# Altium PCB Drug Delivery CON_V113.PcbDoc (part 1 of 2)
Units mm, origin at the board's own origin, x right, y up, seen from the top; angles counter-clockwise.
Board outline 130.05 x 70.61 mm, 2 copper layers (Top Layer, Bottom Layer); 189 components, 131 nets, 618 pads, 110 vias.
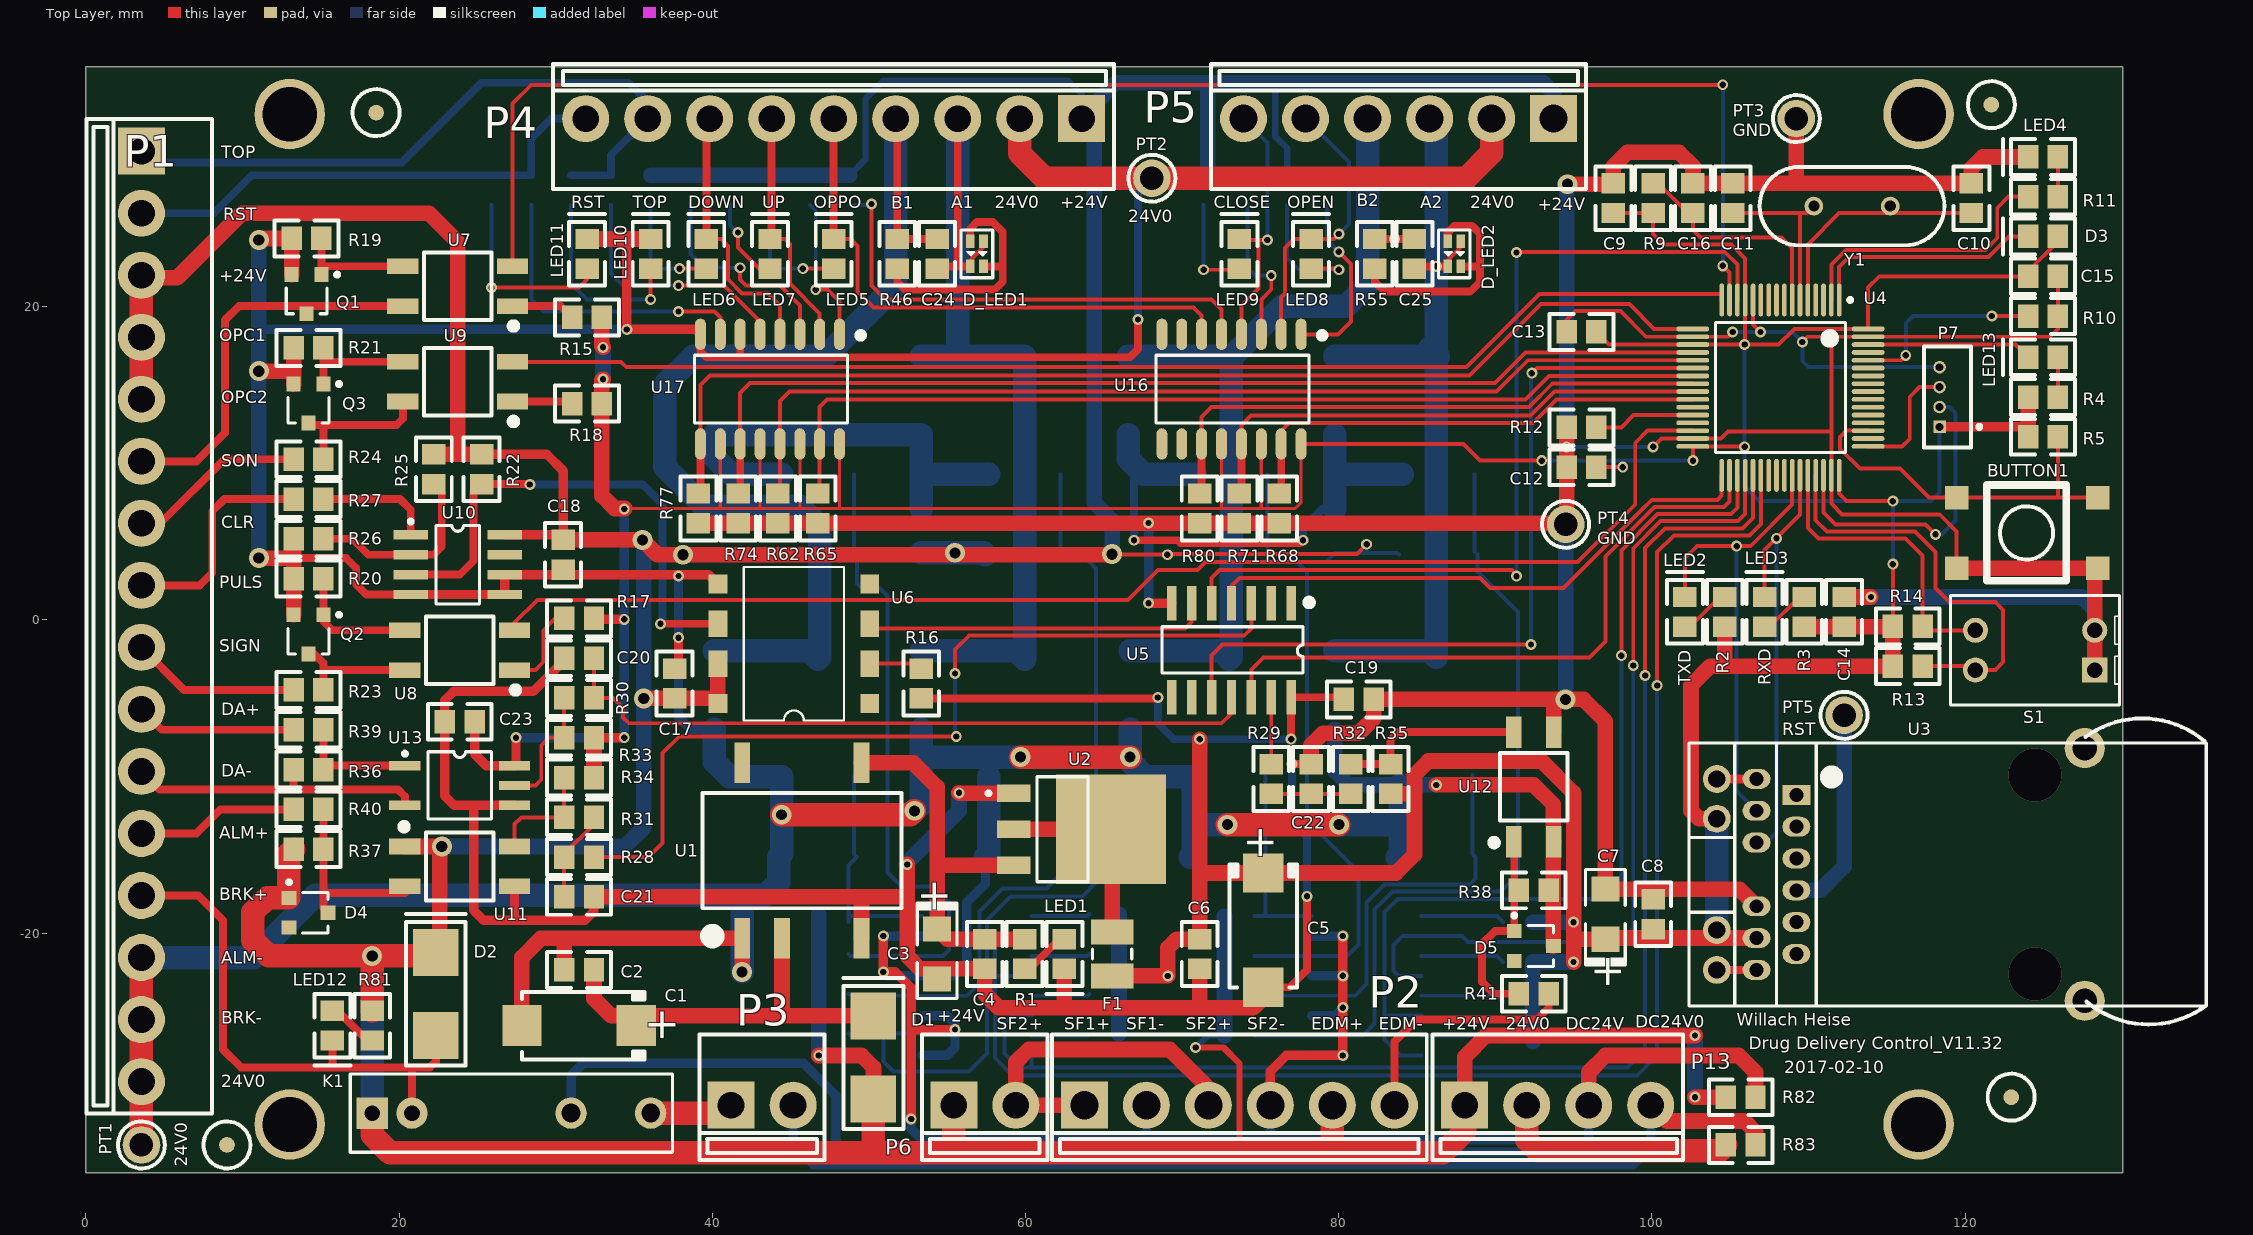
[diagram p0: Top Layer view]
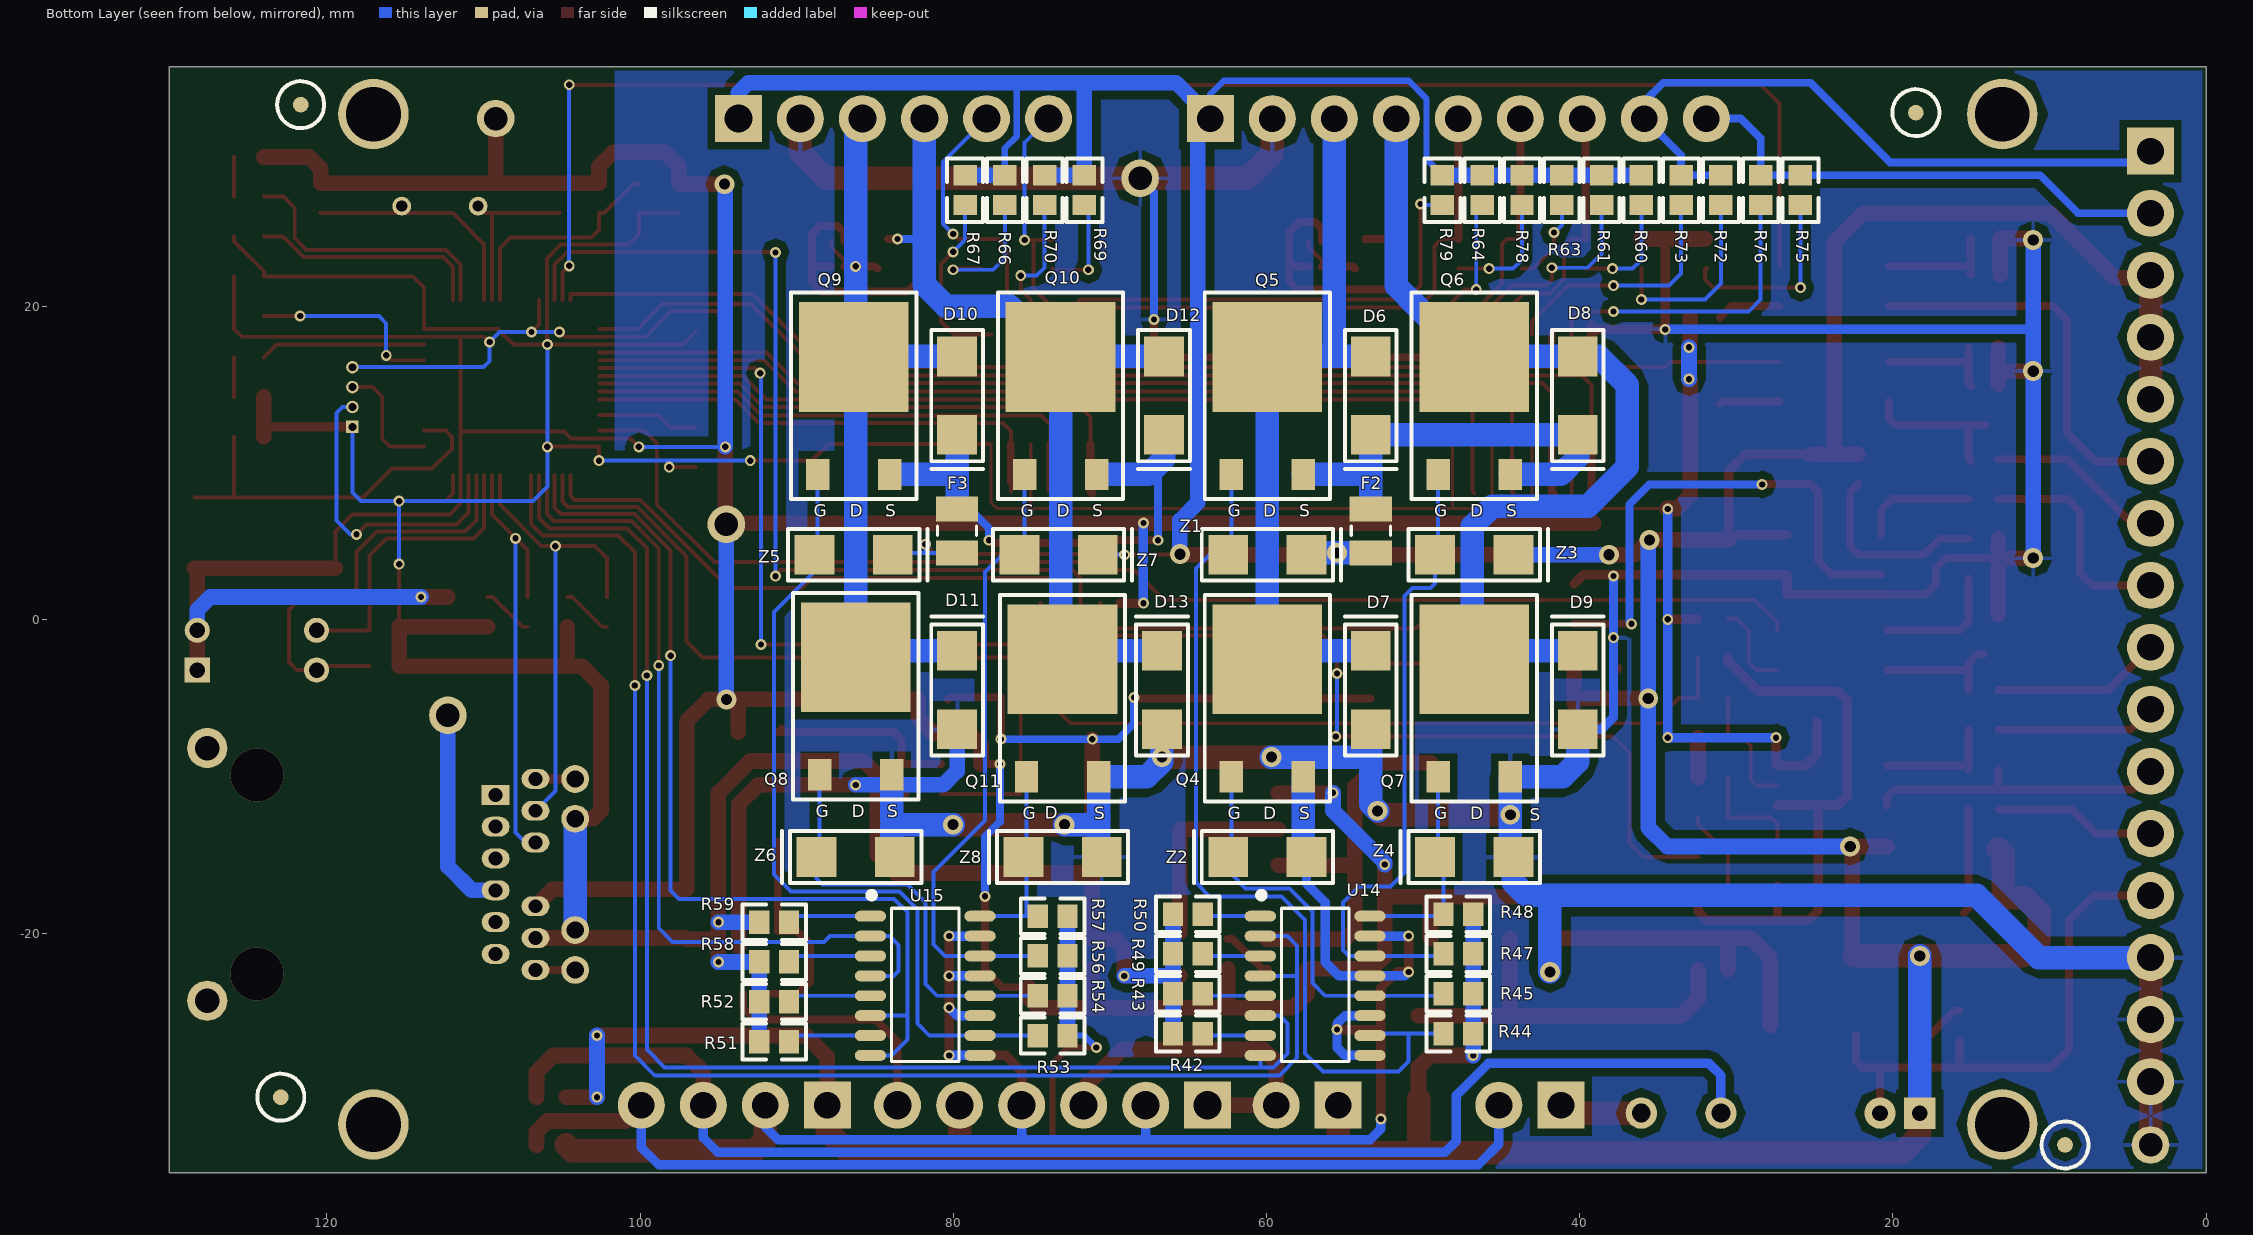
[diagram p1: Bottom Layer view, seen from below]

## Layer stack, top to bottom
Top Layer: signal copper 0.0356
Dielectric: dielectric 0.32, FR-4, Dk 4.8
Bottom Layer: signal copper 0.0356

## Board outline
0,35.306 0,-35.306 130.048,-35.306 130.048,35.306

## Design rules (kind name [scope] priority, off if disabled: settings)
Clearance [All] p1: gap=0.2
ComponentClearance [All] p1: gap=0.254 collisioncheckmode=3 verticalgap=0.254
PolygonConnect [All] p1: connectstyle=Relief reliefconductorwidth=0.254 reliefentries=4 polygonreliefangle="90 Angle"
RoutingVias [All] p1: holewidth=0.4 width=0.7 viastyle="Through Hole" minholewidth=0.4 minwidth=0.7 maxholewidth=0.711 maxwidth=1.27
SolderMaskExpansion [All] p1: expansion=0.102
TestPointUsage [All] p1: valid=0 allowmultiple=FALSE
Testpoint [All] p1: side=15 testpointundercomponent=TRUE minsize=1.016 maxsize=2.54 preferedsize=1.524 minholesize=0 maxholesize=1.016 preferedholesize=0.813 testpointgrid=0.025 style=1023 order=0-112345678
Width [All] p1: maxlimit=2 minlimit=0.2 preferedwidth=0.254
18 further rules are at their usual default settings.

## Components (designator, comment, footprint, x,y, rotation, side; value= is the part's Value field where it differs from the comment)
BUTTON1 "SW4" BUTTON 123.952,5.588 r180 top
C1 "Cap Pol3" "CAP D-7343" 31.496,-25.908 r180 top
C2 "Cap" 0805 31.496,-22.352 r180 top
C3 "Cap Pol3" "CAP A-3216" 54.356,-21.336 r270 top
C4 "Cap" 0805 57.404,-21.336 r90 top
C5 "Cap Pol3" "CAP D-7343" 75.184,-19.812 r270 top
C6 "Cap" 0805 71.12,-21.336 r90 top
C7 "Cap Pol3" "CAP A-3216" 97.028,-18.796 r90 top
C8 "Cap" 0805 100.076,-18.796 r270 top
C9 "Cap" 0805 97.536,26.924 r270 top
C10 "" 0805 120.396,26.924 r270 top
C11 "" 0805 105.156,26.924 r270 top
C12 "Cap" 0805 95.504,9.744 r0 top
C13 "Cap" 0805 95.504,18.38 r0 top
C14 "Cap" 0805 112.268,0.508 r270 top
C15 "Cap" 0805 124.968,21.936 r180 top
C16 "Cap" 0805 102.616,26.924 r270 top
C17 "Cap" 0805 37.592,-4.064 r90 top
C18 "Cap" 0805 30.48,4.156 r90 top
C19 "Cap" 0805 81.28,-5.08 r180 top
C20 "Cap" 0805 31.496,-2.448 r180 top
C21 "Cap" 0805 31.496,-17.688 r0 top
C22 "Cap" 0805 78.232,-10.16 r90 top
C23 "Cap" 0805 23.876,-6.512 r180 top
C24 "Cap" 0805 54.356,23.368 r270 top
C25 "Cap" 0805 84.836,23.368 r270 top
D1 "1N5819(SS14)" SMA#1 50.292,-27.94 r90 top
D2 "1N5822(SS34)" SMA#1 22.352,-23.876 r90 top
D3 "Diode 1N4148" LED-0805 124.968,24.476 r180 top
D4 "Diode BAR 99" SOT-23 14.224,-18.704 r270 top
D5 "Diode BAR 99" SOT-23 92.456,-20.828 r270 top
D6 "1N5822(SS34)" SMA#2 53.34,14.316 r270 bottom
D7 "1N5822(SS34)" SMA#2 53.34,-4.48 r90 bottom
D8 "1N5822(SS34)" SMA#2 40.132,14.316 r270 bottom
D9 "1N5822(SS34)" SMA#2 40.132,-4.48 r90 bottom
D10 "1N5822(SS34)" SMA#2 79.756,14.316 r270 bottom
D11 "1N5822(SS34)" SMA#2 79.756,-4.48 r90 bottom
D12 "1N5822(SS34)" SMA#2 66.548,14.316 r270 bottom
D13 "1N5822(SS34)" SMA#2 66.675,-4.48 r90 bottom
D_LED1 "LED_double" "Double LED-0603" 56.896,23.368 r90 top
D_LED2 "LED_double" "Double LED-0603" 87.376,23.368 r90 top
F1 "Fuse 1A" 3225[1210] 65.532,-21.336 r270 top
F2 "Fuse 1A" 3225[1210] 53.34,5.68 r270 bottom
F3 "Fuse 1A" 3225[1210] 79.756,5.68 r270 bottom
K1 "Relay-SPST" Delay_APA3312 25.908,-31.496 r0 top
LED1 "LED" LED-0805 62.484,-21.336 r270 top
LED2 "TXD" LED-0805 102.108,0.508 r90 top
LED3 "RXD" LED-0805 107.188,0.508 r90 top
LED4 "WORKING" LED-0805 124.968,29.556 r180 top
LED5 "LED" LED-0805 47.752,23.368 r90 top
LED6 "LED" LED-0805 39.624,23.368 r90 top
LED7 "LED" LED-0805 43.688,23.368 r90 top
LED8 "LED" LED-0805 78.232,23.368 r90 top
LED9 "LED" LED-0805 73.66,23.368 r90 top
LED10 "LED" LED-0805 36.068,23.368 r90 top
LED11 "LED" LED-0805 32.004,23.368 r90 top
LED12 "LED" LED-0805 15.748,-25.908 r270 top
LED13 "LED" LED-0805 124.968,16.764 r180 top
P1 "接伺服驱动器X4" "VH3.96 16PIN" 3.556,0.219 r270 top
P2 "安全功能端口" "VH3.96  6PIN" 73.66,-30.988 r0 top
P3 "接电机制动器端口" "VH3.96  2PIN" 43.18,-30.988 r0 top
P4 "闸门电机传感器端" "VH3.96 9PIN" 47.752,32.004 r180 top
P5 "药斗电机传感器端口" "VH3.96  6PIN" 83.82,32.004 r180 top
P6 "PIN2_3.96" "VH3.96  2PIN" 57.404,-30.988 r0 top
P7 "Header 4" PIN4-1.27 118.364,14.224 r90 top
P13 "电源端口" "VH3.96  4PIN" 93.98,-30.988 r0 top
PT1 "24V0" PLUG 3.556,-33.528 r0 top
PT2 "24V0" PLUG 68.072,28.194 r0 top
PT3 "GND" PLUG 109.22,32.004 r0 top
PT4 "GND" PLUG 94.488,6.096 r0 top
PT5 "RST" PLUG 112.268,-6.096 r0 top
Q1 "NPN-1AM(MMBT3904)" SOT-23B 14.097,20.793 r180 top
Q2 "NPN-1AM(MMBT3904)" SOT-23B 14.224,-0.924 r180 top
Q3 "NPN-1AM(MMBT3904)" SOT-23B 14.224,13.808 r180 top
Q4 "FR4105 (NMOS-2)" TO-252 59.944,-7.02 r180 bottom
Q5 "FR5305 (PMOS-2)" TO-252 59.944,12.284 r180 bottom
Q6 "FR5305 (PMOS-2)" TO-252 46.736,12.284 r180 bottom
Q7 "FR4105 (NMOS-2)" TO-252 46.736,-7.02 r180 bottom
Q8 "FR4105 (NMOS-2)" TO-252 86.233,-6.893 r180 bottom
Q9 "FR5305 (PMOS-2)" TO-252 86.36,12.284 r180 bottom
Q10 "FR5305 (PMOS-2)" TO-252 73.152,12.284 r180 bottom
Q11 "FR4105 (NMOS-2)" TO-252 73.025,-7.02 r180 bottom
R1 "Res2" 0805 59.944,-21.336 r270 top
R2 "Res2" 0805 104.648,0.508 r270 top
R3 "Res2" 0805 109.728,0.508 r270 top
R4 "Res2" 0805 124.968,14.224 r0 top
R5 "Res2" 0805 124.968,11.684 r0 top
R9 "Res2" 0805 100.076,26.924 r90 top
R10 "Res2" 0805 124.968,19.396 r180 top
R11 "Res2" 0805 124.968,27.016 r180 top
R12 "Res2" 0805 95.504,12.284 r0 top
R13 "Res2" 0805 116.332,-2.956 r0 top
R14 "Res2" 0805 116.332,-0.416 r0 top
R15 "Res2" 0805 32.004,19.304 r0 top
R16 "Res2" 0805 53.34,-4.064 r90 top
R17 "Res2" 0805 31.496,0.092 r180 top
R18 "Res2" 0805 32.004,13.808 r180 top
R19 "Res2" 0805 14.097,24.349 r0 top
R20 "Res2" 0805 14.224,2.632 r180 top
R21 "Res2" 0805 14.224,17.364 r180 top
R22 "Res2" 0805 25.273,9.617 r270 top
R23 "Res2" 0805 14.224,-4.48 r180 top
R24 "Res2" 0805 14.224,10.252 r180 top
R25 "Res2" 0805 22.225,9.617 r90 top
R26 "Res2" 0805 14.224,5.172 r0 top
R27 "Res2" 0805 14.224,7.712 r180 top
R28 "Res2" 0805 31.496,-15.148 r180 top
R29 "Res2" 0805 75.692,-10.16 r270 top
R30 "Res2" 0805 31.496,-4.988 r180 top
R31 "Res2" 0805 31.496,-12.608 r180 top
R32 "Res2" 0805 80.772,-10.16 r90 top
R33 "Res2" 0805 31.496,-7.528 r180 top
R34 "Res2" 0805 31.496,-10.068 r180 top
R35 "Res2" 0805 83.312,-10.16 r90 top
R36 "Res2" 0805 14.224,-9.56 r180 top
R37 "Res2" 0805 14.224,-14.64 r0 top
R38 "Res2" 0805 92.456,-17.272 r0 top
R39 "Res2" 0805 14.224,-7.02 r180 top
R40 "Res2" 0805 14.224,-12.1 r180 top
R41 "Res2" 0805 92.456,-23.876 r0 top
R42 "Res2" 0805 65.024,-26.416 r180 bottom
R43 "Res2" 0805 65.024,-23.876 r180 bottom
R44 "Res2" 0805 47.752,-26.416 r180 bottom
R45 "Res2" 0805 47.752,-23.876 r180 bottom
R46 "Res2" 0805 51.816,23.368 r270 top
R47 "Res2" 0805 47.752,-21.336 r180 bottom
R48 "Res2" 0805 47.752,-18.796 r180 bottom
R49 "Res2" 0805 65.024,-21.336 r0 bottom
R50 "Res2" 0805 65.024,-18.796 r0 bottom
R51 "Res2" 0805 91.44,-26.924 r180 bottom
R52 "Res2" 0805 91.44,-24.384 r0 bottom
R53 "Res2" 0805 73.66,-26.543 r180 bottom
R54 "Res2" 0805 73.66,-24.003 r180 bottom
R55 "Res2" 0805 82.296,23.368 r270 top
R56 "Res2" 0805 73.66,-21.463 r180 bottom
R57 "Res2" 0805 73.66,-18.923 r180 bottom
R58 "Res2" 0805 91.44,-21.844 r180 bottom
R59 "Res2" 0805 91.44,-19.304 r0 bottom
R60 "Res2" 0805 36.068,27.432 r270 bottom
R61 "Res2" 0805 38.608,27.432 r270 bottom
R62 "Res2" 0805 44.196,7.112 r90 top
R63 "Res2" 0805 41.148,27.432 r270 bottom
R64 "Res2" 0805 46.228,27.432 r270 bottom
R65 "Res2" 0805 46.736,7.112 r90 top
R66 "Res2" 0805 76.708,27.432 r270 bottom
R67 "Res2" 0805 79.248,27.432 r270 bottom
R68 "Res2" 0805 76.2,7.112 r90 top
R69 "Res2" 0805 71.628,27.432 r270 bottom
R70 "Res2" 0805 74.168,27.432 r270 bottom
R71 "Res2" 0805 73.66,7.112 r90 top
R72 "Res2" 0805 30.988,27.432 r270 bottom
R73 "Res2" 0805 33.528,27.432 r90 bottom
R74 "Res2" 0805 41.656,7.112 r90 top
R75 "Res2" 0805 25.908,27.432 r270 bottom
R76 "Res2" 0805 28.448,27.432 r90 bottom
R77 "Res2" 0805 39.116,7.112 r90 top
R78 "Res2" 0805 43.688,27.432 r90 bottom
R79 "Res2" 0805 48.768,27.432 r270 bottom
R80 "Res2" 0805 71.12,7.112 r90 top
R81 "Res2" 0805 18.288,-25.908 r270 top
R82 "Res2" 0805 105.664,-30.48 r0 top
R83 "Res2" 0805 105.664,-33.528 r0 top
S1 "SW DIP-2" "SW2  4DIP" 124.46,-1.94 r90 top
U1 "B2405XT-2WR2" B2405XT-2WR2 45.72,-14.732 r0 top
U2 "AMS1117-3.3" SOT223 62.357,-13.37 r270 top
U3 "USR-K" USR-K 119.38,-16.256 r0 top
U4 "STM32F103RCT6" LQFP64_M 108.204,14.824 r270 top
U5 "74HC14D" SO14 73.152,-1.94 r270 top
U6 "HCPL-4504-300" SO8(7.62) 45.212,-1.524 r180 top
U7 "TLP185" SOP4 23.749,21.301 r180 top
U8 "TLP185" SOP4 23.876,-1.94 r180 top
U9 "TLP185" SOP4 23.749,15.205 r180 top
U10 "LM293D" SOP8 23.749,3.521 r0 top
U11 "TLP185" SOP4 23.876,-15.748 r0 top
U12 "TLP185" SOP4 92.456,-10.668 r90 top
U13 "TLP115" SOP5(6) 23.876,-10.576 r0 top
U14 "TLP280-4" SOP16 56.896,-23.368 r270 bottom
U15 "TLP280-4" SOP16 81.788,-23.368 r270 bottom
U16 "TLP280-4" SOP16 73.152,14.732 r180 top
U17 "TLP280-4" SOP16 43.688,14.732 r180 top
Y1 "8M" XTAL 112.776,26.416 r180 top
Z1 "12V" SMA#2 59.944,4.156 r180 bottom
Z2 "12V" SMA#2 59.944,-15.148 r0 bottom
Z3 "12V" SMA#2 46.736,4.156 r180 bottom
Z4 "12V" SMA#2 46.736,-15.148 r0 bottom
Z5 "12V" SMA#2 86.36,4.156 r180 bottom
Z6 "12V" SMA#2 86.233,-15.148 r0 bottom
Z7 "12V" SMA#2 73.279,4.156 r180 bottom
Z8 "12V" SMA#2 73.025,-15.148 r0 bottom

## Footprints (in the part's own frame and the unit in brackets; to place one, negate y for a bottom-side part, rotate by r counter-clockwise, add the part's x,y. Pads: shape width x height; smd on the part's side, far side on the other; paste and mask are expansions set on the pad)
0805 [mm]
  rect 1.3x1.5 smd: 1(-0.95,0) 2(0.95,0)
  silkscreen extent -2.03,-1.14 2.03,1.14
3225[1210] [mm] "Chip Resistor; Body 3.2 x 2.5 mm (LxW typ)"
  rect 1.6x2.7 smd: 1(-1.4,0) 2(1.4,0)
  silkscreen extent -0.3,-1.25 0.3,1.25
B2405XT-2WR2 [mm]
  rect 1x2.6 smd: 1(-3.81,-5.6) 2(-1.27,-5.6) 4(3.81,-5.6) 5(3.81,5.6) 8(-3.81,5.6)
  silkscreen extent -6.35,-5.74 6.35,3.68
BUTTON [mm]
  rect 1.5x1.5 smd: 1(4.5,-2.211) 2(-4.5,-2.211) 3(4.5,2.289) 4(-4.5,2.289)
  silkscreen extent -2.5,-3.01 2.58,3.09
"CAP A-3216" [mm]
  rect 1.6x1.8 smd: 1(-1.6,0) 2(1.6,0)
  silkscreen extent -3.25,-1.27 2.85,1.27
"CAP D-7343" [mm]
  rect 2.5x2.6 smd: 1(-3.65,0) 2(3.65,0)
  silkscreen extent -4.19,-2.15 3.65,2.15
Delay_APA3312 [mm]
  rect 2x2 hole 1: 1(-7.62,0)
  round 2 hole 1: 2(-5.08,0)
  round 2 hole 1.2: 3(5.08,0) 4(10.16,0)
  silkscreen extent -9.02,-2.5 11.56,2.5
"Double LED-0603" [mm]
  rect 0.85x0.55 smd: 1(-0.8,0.425) 2(-0.8,-0.425) 3(0.8,-0.425) 4(0.8,0.425)
  silkscreen extent -1.52,-1.02 1.52,1.02
LED-0805 [mm]
  rect 1.3x1.5 smd: 1(-0.95,0) 2(0.95,0)
  silkscreen extent -2.03,-1.14 2.54,1.14
LQFP64_M [mm] "Thin QFP, 64-Leads, Body 10x10mm, Pitch 0.5mm, IPC Low Density"
  oval 2.1x0.3 smd: 1(-5.6,3.75) 2(-5.6,3.25) 3(-5.6,2.75) 4(-5.6,2.25) 5(-5.6,1.75) 6(-5.6,1.25) 7(-5.6,0.75) 8(-5.6,0.25) 9(-5.6,-0.25) 10(-5.6,-0.75) 11(-5.6,-1.25) 12(-5.6,-1.75) 13(-5.6,-2.25) 14(-5.6,-2.75) 15(-5.6,-3.25) 16(-5.6,-3.75) 33(5.6,-3.75) 34(5.6,-3.25) 35(5.6,-2.75) 36(5.6,-2.25) 37(5.6,-1.75) 38(5.6,-1.25) 39(5.6,-0.75) 40(5.6,-0.25) 41(5.6,0.25) 42(5.6,0.75) 43(5.6,1.25) 44(5.6,1.75) 45(5.6,2.25) 46(5.6,2.75) 47(5.6,3.25) 48(5.6,3.75)
  oval 0.3x2.1 smd: 17(-3.75,-5.6) 18(-3.25,-5.6) 19(-2.75,-5.6) 20(-2.25,-5.6) 21(-1.75,-5.6) 22(-1.25,-5.6) 23(-0.75,-5.6) 24(-0.25,-5.6) 25(0.25,-5.6) 26(0.75,-5.6) 27(1.25,-5.6) 28(1.75,-5.6) 29(2.25,-5.6) 30(2.75,-5.6) 31(3.25,-5.6) 32(3.75,-5.6) 49(3.75,5.6) 50(3.25,5.6) 51(2.75,5.6) 52(2.25,5.6) 53(1.75,5.6) 54(1.25,5.6) 55(0.75,5.6) 56(0.25,5.6) 57(-0.25,5.6) 58(-0.75,5.6) 59(-1.25,5.6) 60(-1.75,5.6) 61(-2.25,5.6) 62(-2.75,5.6) 63(-3.25,5.6) 64(-3.75,5.6)
  silkscreen extent -5.72,-4.15 4.15,4.58, body extent -5,-5 5,5, height 1.6
PIN4-1.27 [mm]
  rect 0.8x0.8 hole 0.5: 1(-1.905,0)
  round 0.8 hole 0.5: 2(-0.635,0) 3(0.635,0) 4(1.905,0)
  silkscreen extent -3.23,-2.66 3.23,1
PLUG [mm]
  round 2.4 hole 1.5: 1(0,0)
  silkscreen extent -1.5,-1.5 1.5,1.5
SMA#1 [mm] "1N5822"
  rect 3x2.9 smd: 1(-2.65,0) 2(2.65,0)
  silkscreen extent -4.57,-1.91 5.08,1.91
SMA#2 [mm] "wide = 5.0mm"
  rect 2.54x2.54 smd: 1(-2.5,0) 2(2.5,0)
  silkscreen extent -4.19,-1.65 4.7,1.65
SO8(7.62) [mm]
  rect 1.2x1.2 smd: 1(-4.85,3.81) 4(-4.85,-3.81) 5(4.85,-3.81) 8(4.85,3.81)
  rect 1.2x1.7 smd: 2(-4.85,1.27) 3(-4.85,-1.27) 6(4.85,-1.27) 7(4.85,1.27)
  silkscreen extent -3.2,-4.9 3.2,4.9
SO14 [mm] "Wide = 6mm"
  rect 2.2x0.6 smd: 1(-3,3.81) 2(-3,2.54) 3(-3,1.27) 4(-3,0) 5(-3,-1.27) 6(-3,-2.54) 7(-3,-3.81) 8(3,-3.81) 9(3,-2.54) 10(3,-1.27) 11(3,0) 12(3,1.27) 13(3,2.54) 14(3,3.81)
  silkscreen extent -3.23,-4.44 1.45,5.13
SOP4 [mm] "7 * 2.54"
  rect 2x1 smd: 1(-3.5,1.27) 2(-3.5,-1.27) 3(3.5,-1.27) 4(3.5,1.27)
  silkscreen extent -3.74,-2.16 2.16,2.72
SOP5(6) [mm]
  rect 2x0.6 smd: 1(-3.5,1.27) 3(-3.5,-1.27) 4(3.5,-1.27) 5(3.5,0) 6(3.5,1.27)
  silkscreen extent -3.62,-2.15 2.03,2.16
SOP8 [mm] "wide"
  rect 2.2x0.6 smd: 1(-3,1.905) 2(-3,0.635) 3(-3,-0.635) 4(-3,-1.905) 5(3,-1.905) 6(3,-0.635) 7(3,0.635) 8(3,1.905)
  silkscreen extent -3.12,-2.5 1.4,2.88
SOP16 [mm] "wide = 7mm"
  oval 0.7x2 smd: 1(-4.445,-3.5) 2(-3.175,-3.5) 3(-1.905,-3.5) 4(-0.635,-3.5) 5(0.635,-3.5) 6(1.905,-3.5) 7(3.175,-3.5) 8(4.445,-3.5) 9(4.445,3.5) 10(3.175,3.5) 11(1.905,3.5) 12(0.635,3.5) 13(-0.635,3.5) 14(-1.905,3.5) 15(-3.175,3.5) 16(-4.445,3.5)
  silkscreen extent -5.99,-3.63 4.82,2.16
SOT223 [mm] "SOT-223/SC-73; 4 Leads; Body 6.7 x 7.3 mm, inc. leads (LxW max)"
  rect 1.1x2.15 smd: 1(-2.3,-3.1) 2(0,-3.1) 3(2.3,-3.1)
  rect 3.5x2.15 smd: 4(0,3.1)
  silkscreen extent -3.35,-4.85 3.35,1.63
SOT-23 [mm] "SOT-23; 3 Leads; Body 3.0 x 2.6 mm, inc. leads (LxW max)"
  rect 0.9x0.95 smd: 1(-0.95,-1.25) 2(0.95,-1.25) 3(0,1.25)
  silkscreen extent -2.07,-1.37 1.3,1.25
SOT-23B [mm] "SOT-23; 3 Leads; Body 3.0 x 2.6 mm, inc. leads (LxW max)"
  rect 0.9x0.95 smd: 1(-0.95,-1.25) 2(0.95,-1.25) 3(0,1.25)
  silkscreen extent -2.08,-1.37 1.3,1.25
"SW2  4DIP" [mm] "侧拨"
  rect 1.6x1.6 hole 1: 1(-1.27,-3.81)
  round 1.6 hole 1: 2(1.27,-3.81) 3(-1.27,3.81) 4(1.27,3.81)
  silkscreen extent -3.5,-5.4 3.5,5.4
TO-252 [mm]
  rect 1.5x2 smd: 1(-2.3,-3) 3(2.3,-3)
  rect 7x7 smd: 2(0,4.5)
  silkscreen extent -4,-4.57 4,8.62
USR-K [mil]
  rect 70x50 hole 35 mask+2: 1(-400,200)
  oval 70x50 hole 35 mask+2: 2(-400,120) 3(-400,40) 4(-400,-40) 5(-400,-120) 6(-400,-200) 7(-500,240) 8(-500,160) 9(-500,80) 10(-500,-80) 11(-500,-160) 12(-500,-240)
  round 70 hole 43 mask+2: 13(-600,240) 14(-600,140) 15(-600,-140) 16(-600,-240)
  round 101.18 hole 61.81 mask+2: 17(325,-317.5) 17(325,317.5)
  silkscreen extent -670,-377 630,392
"VH3.96 9PIN" [mm]
  rect 3x3 hole 1.7: 1(-15.84,0)
  round 3 hole 1.7: 2(-11.88,0) 3(-7.92,0) 4(-3.96,0) 5(0,0) 6(3.96,0) 7(7.92,0) 8(11.88,0) 9(15.84,0)
  silkscreen extent -17.9,-3.5 17.91,4.5
"VH3.96 16PIN" [mm]
  rect 3x3 hole 1.7: 1(-29.7,0)
  round 3 hole 1.7: 2(-25.74,0) 3(-21.78,0) 4(-17.82,0) 5(-13.86,0) 6(-9.9,0) 7(-5.94,0) 8(-1.98,0) 9(1.98,0) 10(5.94,0) 11(9.9,0) 12(13.86,0) 13(17.82,0) 14(21.78,0) 15(25.74,0) 16(29.7,0)
  silkscreen extent -31.76,-3.5 31.73,4.5
"VH3.96  2PIN" [mm]
  rect 3x3 hole 1.7: 1(-1.98,0)
  round 3 hole 1.7: 2(1.98,0)
  silkscreen extent -4,-3.5 4,4.5
"VH3.96  4PIN" [mm]
  rect 3x3 hole 1.7: 1(-5.94,0)
  round 3 hole 1.7: 2(-1.98,0) 3(1.98,0) 4(5.94,0)
  silkscreen extent -8,-3.5 8,4.5
"VH3.96  6PIN" [mm]
  rect 3x3 hole 1.8: 1(-9.9,0)
  round 3 hole 1.8: 2(-5.94,0) 3(-1.98,0) 4(1.98,0) 5(5.94,0) 6(9.9,0)
  silkscreen extent -11.96,-3.5 11.96,4.5
XTAL [mm]
  round 1.2 hole 0.711: 1(-2.44,0) 2(2.44,0)
  silkscreen extent -5.9,-2.5 5.9,2.5

## Part data
C1 C3 C5 C7: "Polarized Capacitor (Surface Mount)"
C2 C4 C6 C8 C9 C12 C13 C14 C15 C16 C17 C18 C19 C20 C21 C22 C23 C24 C25: "Capacitor"
C10 C11: library part Cap, "Capacitor"
D1 D2 D6 D7 D8 D9 D10 D11 D12 D13: library part "Diode 1N4148", "High Conductance Fast Diode"
D3: "High Conductance Fast Diode"
D4 D5: library part "Diode BAS21", "Silicon Switching Diode for High-Speed, High-Voltage Switching"
F1 F2 F3: library part "Fuse 1", "Fuse"
K1: "Single-Pole Single-Throw Relay"
LED2 LED3 LED5 LED6 LED7 LED8 LED9 LED10 LED11 LED12 LED13: library part LED2, "Typical RED, GREEN, YELLOW, AMBER GaAs LED"
LED4: library part LED
P1: library part "Header 14", "Header, 14-Pin"
P2 P13: library part "Header 4", "Header, 4-Pin"
P3: library part "Header 2", "Header, 2-Pin"
P4: library part "Header 9", "Header, 9-Pin"
P5: library part "Header 6", "Header, 6-Pin"
P7: "Header, 4-Pin"
PT1 PT2 PT3 PT4 PT5: library part Plug, "Plug"
Q1 Q2 Q3: library part NPN, "NPN Bipolar Transistor"
Q4 Q7 Q8 Q11: library part NMOS-2, "N-Channel Power MOSFET"
Q5 Q6 Q9 Q10: library part PMOS-2, "P-Channel Power MOSFET"
R1 R2 R3 R4 R5 R9 R10 R11 R12 R13 R14 R15 R16 R17 R18 R19 R20 R21 R22 R23 R24 R25 R26 R27 R28 R29 R30 R31 R32 R33 R34 R35 R36 R37 R38 R39 R40 R41 R42 R43 R44 R45 R46 R47 R48 R49 R50 R51 R52 R53 R54 R55 R56 R57 R58 R59 R60 R61 R62 R63 R64 R65 R66 R67 R68 R69 R70 R71 R72 R73 R74 R75 R76 R77 R78 R79 R80 R81 R82 R83: "Resistor"
S1: "DIP Switch, 2 Position, SPST"
U2: library part AMS1117-5
U5: library part SN74HC14D, "Hex Schmitt-Trigger Inverter"
U6 U13: library part Optoisolator2, "5 Pin Mini Flat Pack Optocoupler"
U7 U8 U9 U11 U12: library part Optoisolator1, "4-Pin Phototransistor Optocoupler"
U10: "Dual Comparator"
U14 U15 U16 U17: library part TLP521-4
Y1: library part XTAL_1
Z1 Z2 Z3 Z4 Z5 Z6 Z7 Z8: library part "D Zener", "Zener Diode"

## Free pads (board coordinates)
  round 1 smd: 0(9.017,-33.528) 0(18.542,32.385) 0(121.666,32.893) 0(122.936,-30.48)
  round 4.5 hole 3.5: 0(13.024,-32.214) 0(13.024,32.286) 0(117.024,-32.214) 0(117.024,32.286)
  rect 7x7 smd: 1(65.457,-13.37)
  round 1 smd far side: 4(9.017,-33.528) 4(18.542,32.385) 4(121.666,32.893) 4(122.936,-30.48)

## Via types
v1: diameter 0.7, hole 0.4, Top Layer to Bottom Layer, 89 vias
v2: diameter 1.27, hole 0.711, Top Layer to Bottom Layer, 10 vias
v3: diameter 1.27, hole 0.7, Top Layer to Bottom Layer, 9 vias
v4: diameter 3.4, hole 3.4, Top Layer to Bottom Layer, 2 vias

## Nets (pads, with @x,y where several pads share a name; then routed paths per layer and width w, separated by ;. In a path a pad name is that pad's centre, name@x,y a point inside that pad or via, vN(x,y) a via of type N, cw(c..) or ccw(c..) an arc to the next point about the centre after c; other vN are vias at no path point)
24V0: C1.2 C2.2 C17.2 C18.1 D5.3 D7.1 D9.1 D11.1 D13.1 LED10.2 LED11.2 P1.14 P1.15 P1.16 P2.2 P2.4 P4.2 P5.2 P13.2 PT1.1 PT2.1 Q1.2 Q2.2 Q3.2 Q4.3 Q7.3 Q8.3 Q11.3 R19.1 R20.2 R21.2 R26.1 R38.2 R83.1 U1.1 U6.5 U10.4 U10.5 U10.6 U12.2 U14.9 U14.11 U14.13 U14.15 U15.9 U15.11 U15.13 U15.15 U17.6 U17.8 Z2.1 Z4.1 Z6.1 Z8.1 | length 509.2
  Top Layer w0.5: 13.274,3.81 13.401,3.937 16.637,3.937 17.272,3.302 17.272,2.251 17.907,1.616 U10.4@20.749,1.616 ; U17.8@39.243,18.232 39.243,17.145 39.624,16.764 66.675,16.764 67.183,17.272 v1(67.183,19.177) ; 41.783,16.764 U17.6@41.783,18.232
  Top Layer w0.6: U10.4@20.749,1.616 U10.5@26.749,1.616 U10.6@26.749,2.886 39.762,2.886 U6.5@40.362,2.286 ; 34.544,24.318 v1(34.544,18.542) 38.933,18.542 U17.8@39.243,18.232 ; C17.2@37.592,-3.114 37.846,-2.86 v1(37.846,-1.143) ; v1(37.846,2.794) v1@37.846,2.886 ; U17.8@39.243,18.034 U17.8@39.243,18.832 ; v1(50.927,-20.193) v1(50.927,-22.479) 51.689,-22.479 52.705,-23.495 v1(52.705,-31.877) ; 52.705,-26.162 v1(55.499,-26.162) ; P2.4@75.64,-30.988 75.64,-28.829 76.656,-27.813 v1(80.264,-27.813) v1(80.264,-20.193)
  Top Layer w1: v2(11.049,3.937) 13.274,3.937 ; v2(11.049,15.875) 13.274,15.875 ; v2(11.049,24.257) 11.141,24.349 R19.1@13.147,24.349 Q1.2@13.147,22.043 ; Q2.2@13.274,0.326 R26.1@13.274,5.172 ; Q3.2@13.274,15.058 R21.2@13.274,17.364 ; C1.2@27.846,-25.908 27.846,-21.557 29.071,-20.332 U1.1@41.91,-20.332 v2(41.91,-22.479) ; C2.2@30.546,-22.352 30.546,-20.393 30.607,-20.332 ; LED11.2@32.004,24.318 LED10.2@36.068,24.318 ; v1(86.233,-10.541) 92.456,-10.541 93.706,-11.791 D5.3@93.706,-20.828 ; U12.2@93.706,-14.188 U12.2@93.726,-14.168
  Top Layer w1.5: PT1.1@3.556,-33.528 P1.14@3.556,-21.844 ; v3(44.436,-12.446) 52.652,-12.446 v3(52.906,-12.192) ; P4.2@59.632,32.004 59.632,29.776 61.214,28.194 88.138,28.194 89.76,29.816 P5.2@89.76,32.004 ; v3(59.69,-8.763) v3(66.675,-8.763) ; v3(72.898,-13.081) v3(80.01,-13.081) ; P13.2@92,-30.988 92,-33.199 92.71,-33.909 104.333,-33.909 R83.1@104.714,-33.528
  Bottom Layer w0.5: v1(67.183,19.177) 67.183,27.305 PT2.1@68.072,28.194 ; 67.72,-33.006 P2.2@67.72,-30.988 ; 75.64,-33.006 P2.4@75.64,-30.988
  Bottom Layer w0.6: 11.049,18.669 11.168,18.55 v1@34.536,18.55 ; v1(37.846,2.794) 37.846,-6.223 38.603,-6.98 D9.1@40.132,-6.98 ; v1(50.927,-22.479) 51.181,-22.733 55.372,-22.733 56.261,-21.844 56.261,-18.034 57.444,-16.851 Z2.1@57.444,-15.148 ; v1(50.927,-20.193) U14.15@53.396,-20.193 ; v1(52.705,-31.877) 52.705,-32.512 53.391,-33.198 91.187,-33.198 92,-32.385 P13.2@92,-30.988 ; U14.9@53.396,-27.813 54.991,-27.813 55.499,-27.305 55.499,-25.781 54.991,-25.273 U14.11@53.396,-25.273 ; 67.72,-33.169 P2.2@67.72,-30.988 ; P2.4@75.64,-30.988 75.64,-33.146 75.692,-33.198 ; U15.9@78.288,-27.813 v1(80.264,-27.813) ; U15.11@78.288,-25.273 79.756,-25.273 v1(80.264,-24.765) ; U15.13@78.288,-22.733 v1(80.264,-22.733) ; U15.15@78.288,-20.193 v1(80.264,-20.193)
  Bottom Layer w1: v2(11.049,3.937) v2(11.049,24.257) ; P4.2@59.632,32.004 P4.2@59.632,32.962 ; D11.1@79.756,-6.98 79.756,-9.652 80.645,-10.541 v1(86.233,-10.541)
  Bottom Layer w1.5: P1.14@3.556,-21.561 10.697,-21.561 14.657,-17.601 43.399,-17.601 44.236,-16.764 Z4.1@44.236,-15.148 44.436,-14.948 Q7.3@44.436,-10.02 41.1,-10.02 40.132,-9.052 D9.1@40.132,-6.98 ; v2(41.91,-22.479) 41.91,-17.601 ; v3(52.906,-12.192) 53.34,-11.758 D7.1@53.34,-6.98 ; 53.34,-9.144 53.372,-9.049 53.467,-8.763 v3(59.69,-8.763) ; Z2.1@57.444,-15.148 57.644,-14.948 Q4.3@57.644,-10.02 ; D13.1@66.675,-6.98 66.675,-9.052 67.643,-10.02 Q11.3@70.725,-10.02 70.725,-14.948 Z8.1@70.525,-15.148 ; 70.725,-12.954 70.852,-13.081 v3(72.898,-13.081) ; v3(80.01,-13.081) 83.679,-13.081 83.933,-12.827 Q8.3@83.933,-10.541 ; Z6.1@83.733,-15.148 83.933,-14.948 83.933,-13.208 ; 83.796,-13.204 83.921,-13.208
+3.3V: C5.1 C6.2 C7.1 C8.2 C9.2 C12.2 C13.2 C14.2 C15.2 C19.2 C23.1 D3.1 F1.2 P7.1 R2.2 R3.2 R4.1 R5.1 R9.1 R13.1 R14.1 R15.2 R16.1 R17.1 R18.1 R33.1 R34.1 R35.1 R42.1 R43.1 R49.2 R50.2 R51.1 R52.2 R58.1 R59.2 U3.11 U3.14 U3.15 U4.13 U4.19 U4.32 U4.48 U4.64 U5.14 U13.6 U16.12 U16.14 U16.16 U17.10 U17.12 U17.14 U17.16 | length 418.1
  Top Layer w0.2: v1@34.382,7.112 77.216,7.112 77.597,7.493 U16.16@77.597,11.232 ; 40.513,7.112 U17.10@40.513,11.232 ; 43.053,7.112 U17.12@43.053,11.232 ; 45.593,7.112 U17.14@45.593,11.232 ; 48.133,7.112 U17.16@48.133,11.232 ; 72.517,7.112 U16.12@72.517,11.232 ; 75.057,7.112 U16.14@75.057,11.232
  Top Layer w0.254: U16.16@77.597,11.232 87.955,11.232 89.027,10.16 v1(92.964,10.16) ; C12.2@96.454,9.744 v1(98.136,9.744) ; C13.2@96.454,18.38 97.26,17.574 108.093,17.574 109.093,18.574 U4.64@113.804,18.574 ; C9.2@97.536,25.974 R9.1@100.076,25.974 100.076,24.638 100.765,23.949 105.083,23.949 105.954,23.078 v1@105.954,17.618 ; U4.32@102.604,11.074 v1@105.893,11.074 ; v1(102.616,10.16) U4.32@102.616,11.074 ; U4.48@111.954,9.224 111.954,8.061 112.436,7.579 v1(115.382,7.579) ; U4.64@113.792,18.574 113.792,21.209 114.519,21.936 C15.2@124.018,21.936 124.018,22.256 125.918,24.156 D3.1@125.918,24.476 ; R14.1@115.382,-0.416 v1(115.382,3.556)
  Top Layer w0.5: R16.1@53.34,-5.014 68.392,-5.014 v1(68.453,-4.953) ; v1(76.962,-7.62) U5.14@76.962,-4.94 80.19,-4.94 C19.2@80.33,-5.08
  Top Layer w0.6: C23.1@24.826,-6.512 24.826,-8.57 25.562,-9.306 U13.6@27.376,-9.306 27.467,-9.215 v1(27.467,-7.528) ; R33.1@32.446,-7.528 v1(34.382,-7.528) ; R17.1@32.503,0.035 v1(34.382,0.035) ; v1(34.382,7.077) v1@34.417,7.112 ; P7.1@118.364,12.319 R5.1@124.018,12.319
  Top Layer w1: R34.1@32.446,-10.068 R33.1@32.446,-7.528 ; R15.2@32.954,19.304 32.954,17.465 v1(33.02,17.399) ; v1(33.02,15.367) 32.954,15.301 32.954,7.94 33.782,7.112 v1@34.417,7.112 ; F1.2@65.532,-22.736 v1(69.091,-22.736) 69.091,-20.952 69.657,-20.386 C6.2@71.12,-20.386 v1(71.12,-7.62) ; 71.214,-16.162 83.66,-16.162 84.836,-14.986 84.836,-9.906 85.725,-9.017 92.964,-9.017 94.996,-11.049 v1(94.996,-21.844) ; R35.1@83.312,-11.11 84.775,-11.11 84.836,-11.049 ; 94.996,-20.447 95.047,-20.396 C7.1@97.028,-20.396 97.104,-20.32 U3.11@106.68,-20.32 ; U3.14@104.14,-12.7 102.997,-12.7 102.489,-12.192 102.489,-4.191 103.724,-2.956 R13.1@115.382,-2.956 R14.1@115.382,-0.416 ; 104.648,-2.956 R2.2@104.648,-0.442 ; R3.2@109.728,-0.442 R14.1@115.356,-0.442 ; R5.1@124.018,11.684 R4.1@124.018,14.224
  Bottom Layer w0.254: v1(92.964,10.16) v1(102.616,10.16) ; v1(98.136,9.744) 98.136,10.125 98.171,10.16 ; v1(105.918,17.574) 105.918,8.509 106.848,7.579 117.815,7.579 118.364,8.128 P7.1@118.364,12.319 ; v1(115.382,3.556) v1(115.382,7.579)
  Bottom Layer w0.5: v1@68.395,-4.953 v1@68.395,-4.895 ; v1@68.395,-4.927 v1(68.453,-4.953) 68.453,-6.604 69.469,-7.62 v1(76.962,-7.62)
  Bottom Layer w0.6: v1(27.467,-7.528) v1(34.382,-7.528) v1(34.382,7.077)
  Bottom Layer w1: v1(33.02,15.367) v1(33.02,17.399) ; R42.1@65.974,-26.416 R43.1@65.974,-23.876 65.974,-22.86 ; R50.2@65.974,-18.796 65.974,-22.606 66.104,-22.736 v1(69.091,-22.736) ; R51.1@92.39,-26.924 R58.1@92.39,-21.844 v1(94.996,-21.844) ; R59.2@92.39,-19.304 v1(94.996,-19.304)
  Bottom Layer w1.5: U3.15@104.14,-19.812 U3.14@104.14,-12.7
  other v1: 105.918,11.049
+5V: C3.1 C4.2 R1.1 U1.5 U2.3 | length 25.3
  Top Layer w1: U1.5@49.53,-9.132 52.82,-9.132 54.356,-10.668 C3.1@54.356,-19.736 55.006,-20.386 R1.1@59.944,-20.386 ; 54.356,-15.67 U2.3@59.257,-15.67
+24V: C17.1 C18.2 D1.1 D2.2 D4.1 F2.2 F3.2 K1.1 P1.3 P1.4 P1.5 P2.5 P4.1 P5.1 P6.1 P13.1 R22.1 R25.2 R37.1 R44.2 R45.2 R47.2 R48.2 R53.2 R54.2 R56.2 R57.2 R60.1 R61.1 R63.1 R64.1 R66.1 R67.1 R69.1 R70.1 R78.2 R79.1 R81.1 R82.1 U6.7 U6.8 U10.8 U11.1 Z1.2 Z3.2 Z5.2 Z7.2 | length 471.5
  Top Layer w0.254: v2@65.532,4.156 v1(69.053,4.156) ; v2(65.532,4.191) 65.66,4.185 66.259,4.156 ; v1@69.053,4.191 81.153,4.191 v1(81.788,4.826)
  Top Layer w0.4: v1(70.866,-27.305) 72.644,-27.305 73.66,-28.321 73.66,-34.036
  Top Layer w0.5: 50.292,-33.147 D1.1@50.292,-30.59 ; 79.6,-33.006 P2.5@79.6,-30.988
  Top Layer w0.6: R22.1@25.273,10.567 29.438,10.567 30.48,9.525 C18.2@30.48,5.106 30.16,5.426 U10.8@26.749,5.426
  Top Layer w1: P1.3@3.556,21.844 5.842,21.844 9.957,25.959 21.92,25.959 23.749,24.13 23.749,10.567 ; U11.1@20.376,-14.478 v2(22.733,-14.478) ; R25.2@22.225,10.567 R22.1@25.273,10.567 ; D2.2@22.352,-21.226 22.606,-20.972 v2@22.606,-14.478 ; C18.2@30.48,5.106 v2(35.539,5.106) 36.489,4.156 v2@65.659,4.156 ; v2(35.626,-5.014) 40.301,-5.014 U6.8@40.362,-4.953 ; U6.8@40.362,-5.334 U6.7@40.362,-2.794 ; v1(46.802,-27.813) 49.53,-27.813 50.292,-28.575 D1.1@50.292,-30.59 ; P13.1@88.04,-30.988 88.04,-27.911 89.408,-26.543 v1(102.743,-26.543) ; v1(102.743,-30.48) R82.1@104.714,-30.48
  Top Layer w1.5: P1.5@3.556,14.079 P1.3@3.556,21.999 ; R37.1@13.274,-14.64 12.974,-14.94 D4.1@12.974,-17.754 11.583,-17.754 10.668,-18.669 10.668,-20.447 11.684,-21.463 D2.2@22.479,-21.463 ; v2@18.161,-21.463 18.288,-21.59 R81.1@18.288,-24.958 ; K1.1@18.288,-31.496 18.288,-32.893 19.431,-34.036 86.643,-34.036 88.04,-32.639 P13.1@88.04,-30.988 ; 50.165,-34.036 50.292,-33.909 D1.1@50.292,-30.59 ; P6.1@55.424,-30.988 55.424,-33.961 55.499,-34.036 ; P2.5@79.6,-30.988 79.6,-34.007 79.629,-34.036
  Bottom Layer w0.254: v1(69.053,4.156) Z7.2@70.779,4.156 ; F3.2@79.248,3.772 F3.2@79.756,4.28 83.736,4.28 Z5.2@83.86,4.156 ; 81.788,4.28 v1(81.788,4.826)
  Bottom Layer w0.4: R79.1@48.768,28.382 49.784,29.398 49.784,33.274 50.927,34.417 62.738,34.417 63.592,33.563 P4.1@63.592,32.004 ; v1(70.866,-27.305) 71.628,-26.543 R53.2@72.71,-26.543 ; 75.946,34.302 75.946,30.861 76.708,30.099 R66.1@76.708,28.382
  Bottom Layer w1: v2(22.733,-14.478) 34.417,-14.478 35.626,-13.269 35.626,5.019 v2(35.539,5.106) ; R60.1@36.068,28.382 R79.1@48.768,28.382 ; v2(38.135,4.156) Z3.2@44.236,4.156 ; v1(46.802,-27.813) R48.2@46.802,-18.796 ; v2(65.532,4.191) 65.532,6.35 64.389,7.493 64.389,32.905 65.786,34.302 93.079,34.302 93.72,33.661 P5.1@93.72,32.004 ; 71.628,34.302 R69.1@71.628,28.382 R70.1@74.168,28.382 ; R53.2@72.71,-26.543 R57.2@72.71,-18.923 ; R66.1@76.708,28.382 R67.1@79.248,28.382 ; v1(102.743,-30.48) v1(102.743,-26.543)
  Bottom Layer w1.5: K1.1@18.288,-31.496 v2(18.288,-21.463) ; F2.2@53.34,4.28 57.32,4.28 Z1.2@57.444,4.156
  other v3: 55.499,4.28
A1: C24.2 D6.1 D7.2 D_LED1.1 D_LED1.3 P4.3 Q4.2 Q5.2 | length 61.5
  Top Layer w0.254: D_LED1.1@56.471,22.568 56.471,22.943 57.321,23.793 D_LED1.3@57.321,24.168
  Top Layer w0.5: C24.2@54.356,22.418 54.506,22.568 D_LED1.1@56.471,22.568 ; 55.626,22.568 55.672,22.614 P4.3@55.672,32.004
  Bottom Layer w1.5: D7.2@53.34,-1.98 59.404,-1.98 Q4.2@59.944,-2.52 Q5.2@59.944,16.784 59.912,16.816 D6.1@53.34,16.816 ; 55.626,16.816 55.672,16.862 P4.3@55.672,32.004
A2: C25.2 D10.1 D11.2 D_LED2.1 D_LED2.3 P5.3 Q8.2 Q9.2 | length 52.6
  Top Layer w0.254: D_LED2.1@86.951,22.568 86.951,22.943 87.801,23.793 D_LED2.3@87.801,24.168
  Top Layer w0.5: C25.2@84.836,22.418 84.986,22.568 D_LED2.1@86.951,22.568
  Bottom Layer w1.5: D11.2@79.756,-1.98 86.146,-1.98 Q8.2@86.233,-2.067 ; D10.1@79.756,16.816 Q9.2@86.328,16.816 ; Q9.2@85.8,17.344 Q9.2@86.36,16.784 ; P5.3@85.8,32.004 86.233,31.571 Q8.2@86.233,-2.393
  other v1: 86.233,22.568
A-CLR: P1.7 R24.2 | length 11.4
  Top Layer w0.5: P1.7@3.556,6.159 4.762,6.159 8.855,10.252 R24.2@13.274,10.252
ALM: U4.33 U5.4 | length 36.6
  Top Layer w0.254: U5.4@73.152,1.06 73.152,2.159 73.66,2.667 89.027,2.667 89.662,2.032 94.361,2.032 99.373,7.044 99.987,7.658 104.178,7.658 104.454,7.934 U4.33@104.454,9.224
ALM+: P1.12 R40.2 | length 10.4
  Top Layer w0.5: P1.12@3.556,-13.641 7.06,-13.641 8.601,-12.1 R40.2@13.274,-12.1
B1: C24.1 D8.1 D9.2 P4.4 Q6.2 Q7.2 R46.1 | length 69.7
  Top Layer w0.5: P4.4@51.816,32.004 R46.1@51.816,24.318 C24.1@53.693,24.318
  Bottom Layer w1.5: D9.2@40.132,-1.98 46.196,-1.98 Q7.2@46.736,-2.52 46.863,-2.393 46.863,5.969 45.593,7.239 39.497,7.239 36.957,9.779 36.957,14.986 38.787,16.816 46.704,16.816 Q6.2@46.736,16.784 47.172,16.784 50.357,19.969 51.712,21.324 P4.4@51.712,32.004
B2: C25.1 D12.1 D13.2 P5.4 Q10.2 Q11.2 R55.1 | length 57.4
  Top Layer w0.5: R55.1@82.296,24.318 C25.1@84.173,24.318
  Bottom Layer w0.5: 81.84,24.384 81.906,24.318 v1(83.566,24.318)
  Bottom Layer w1.5: D12.1@66.548,16.816 73.12,16.816 Q10.2@73.152,16.784 ; D13.2@66.675,-1.98 72.485,-1.98 Q11.2@73.025,-2.52 73.152,-2.393 Q10.2@73.152,16.784 ; P5.4@81.84,32.004 81.84,21.388 80.483,20.031 76.399,20.031 Q10.2@73.152,16.784
BRKOFF+: D2.1 K1.2 LED12.2 P1.13 | length 34.6
  Top Layer w0.5: P1.13@3.556,-17.601 7.187,-17.601 8.763,-19.177 8.763,-27.432 9.906,-28.575 21.971,-28.575 22.352,-28.194 D2.1@22.352,-26.526 ; 15.748,-28.575 LED12.2@15.748,-26.858 ; K1.2@20.828,-31.496 20.828,-28.575
CLR: U4.16 U9.2 | length 79.6
  Top Layer w0.254: U9.2@27.249,16.475 34.163,16.475 34.509,16.129 88.164,16.129 92.828,20.793 104.429,20.793 104.454,20.768 U4.16@104.454,20.424